# Altium PCB SAMV71_Xplained_Ultra.PcbDoc (part 7 of 7)
Units mm, origin at the board's own origin, x right, y up, seen from the top; angles counter-clockwise.
Board outline 90 x 135 mm, 8 copper layers (Top Layer LF-Signals, Ground Plane 1 (GND), Power Plane (VCC), Ground Plane 2 (GND), Signal Layer 1, Signal Layer 2, Ground Plane 3 (GND), Bottom Layer LF-Signals), stack 1.588 mm thick; 391 components, 330 nets, 1782 pads, 966 vias.
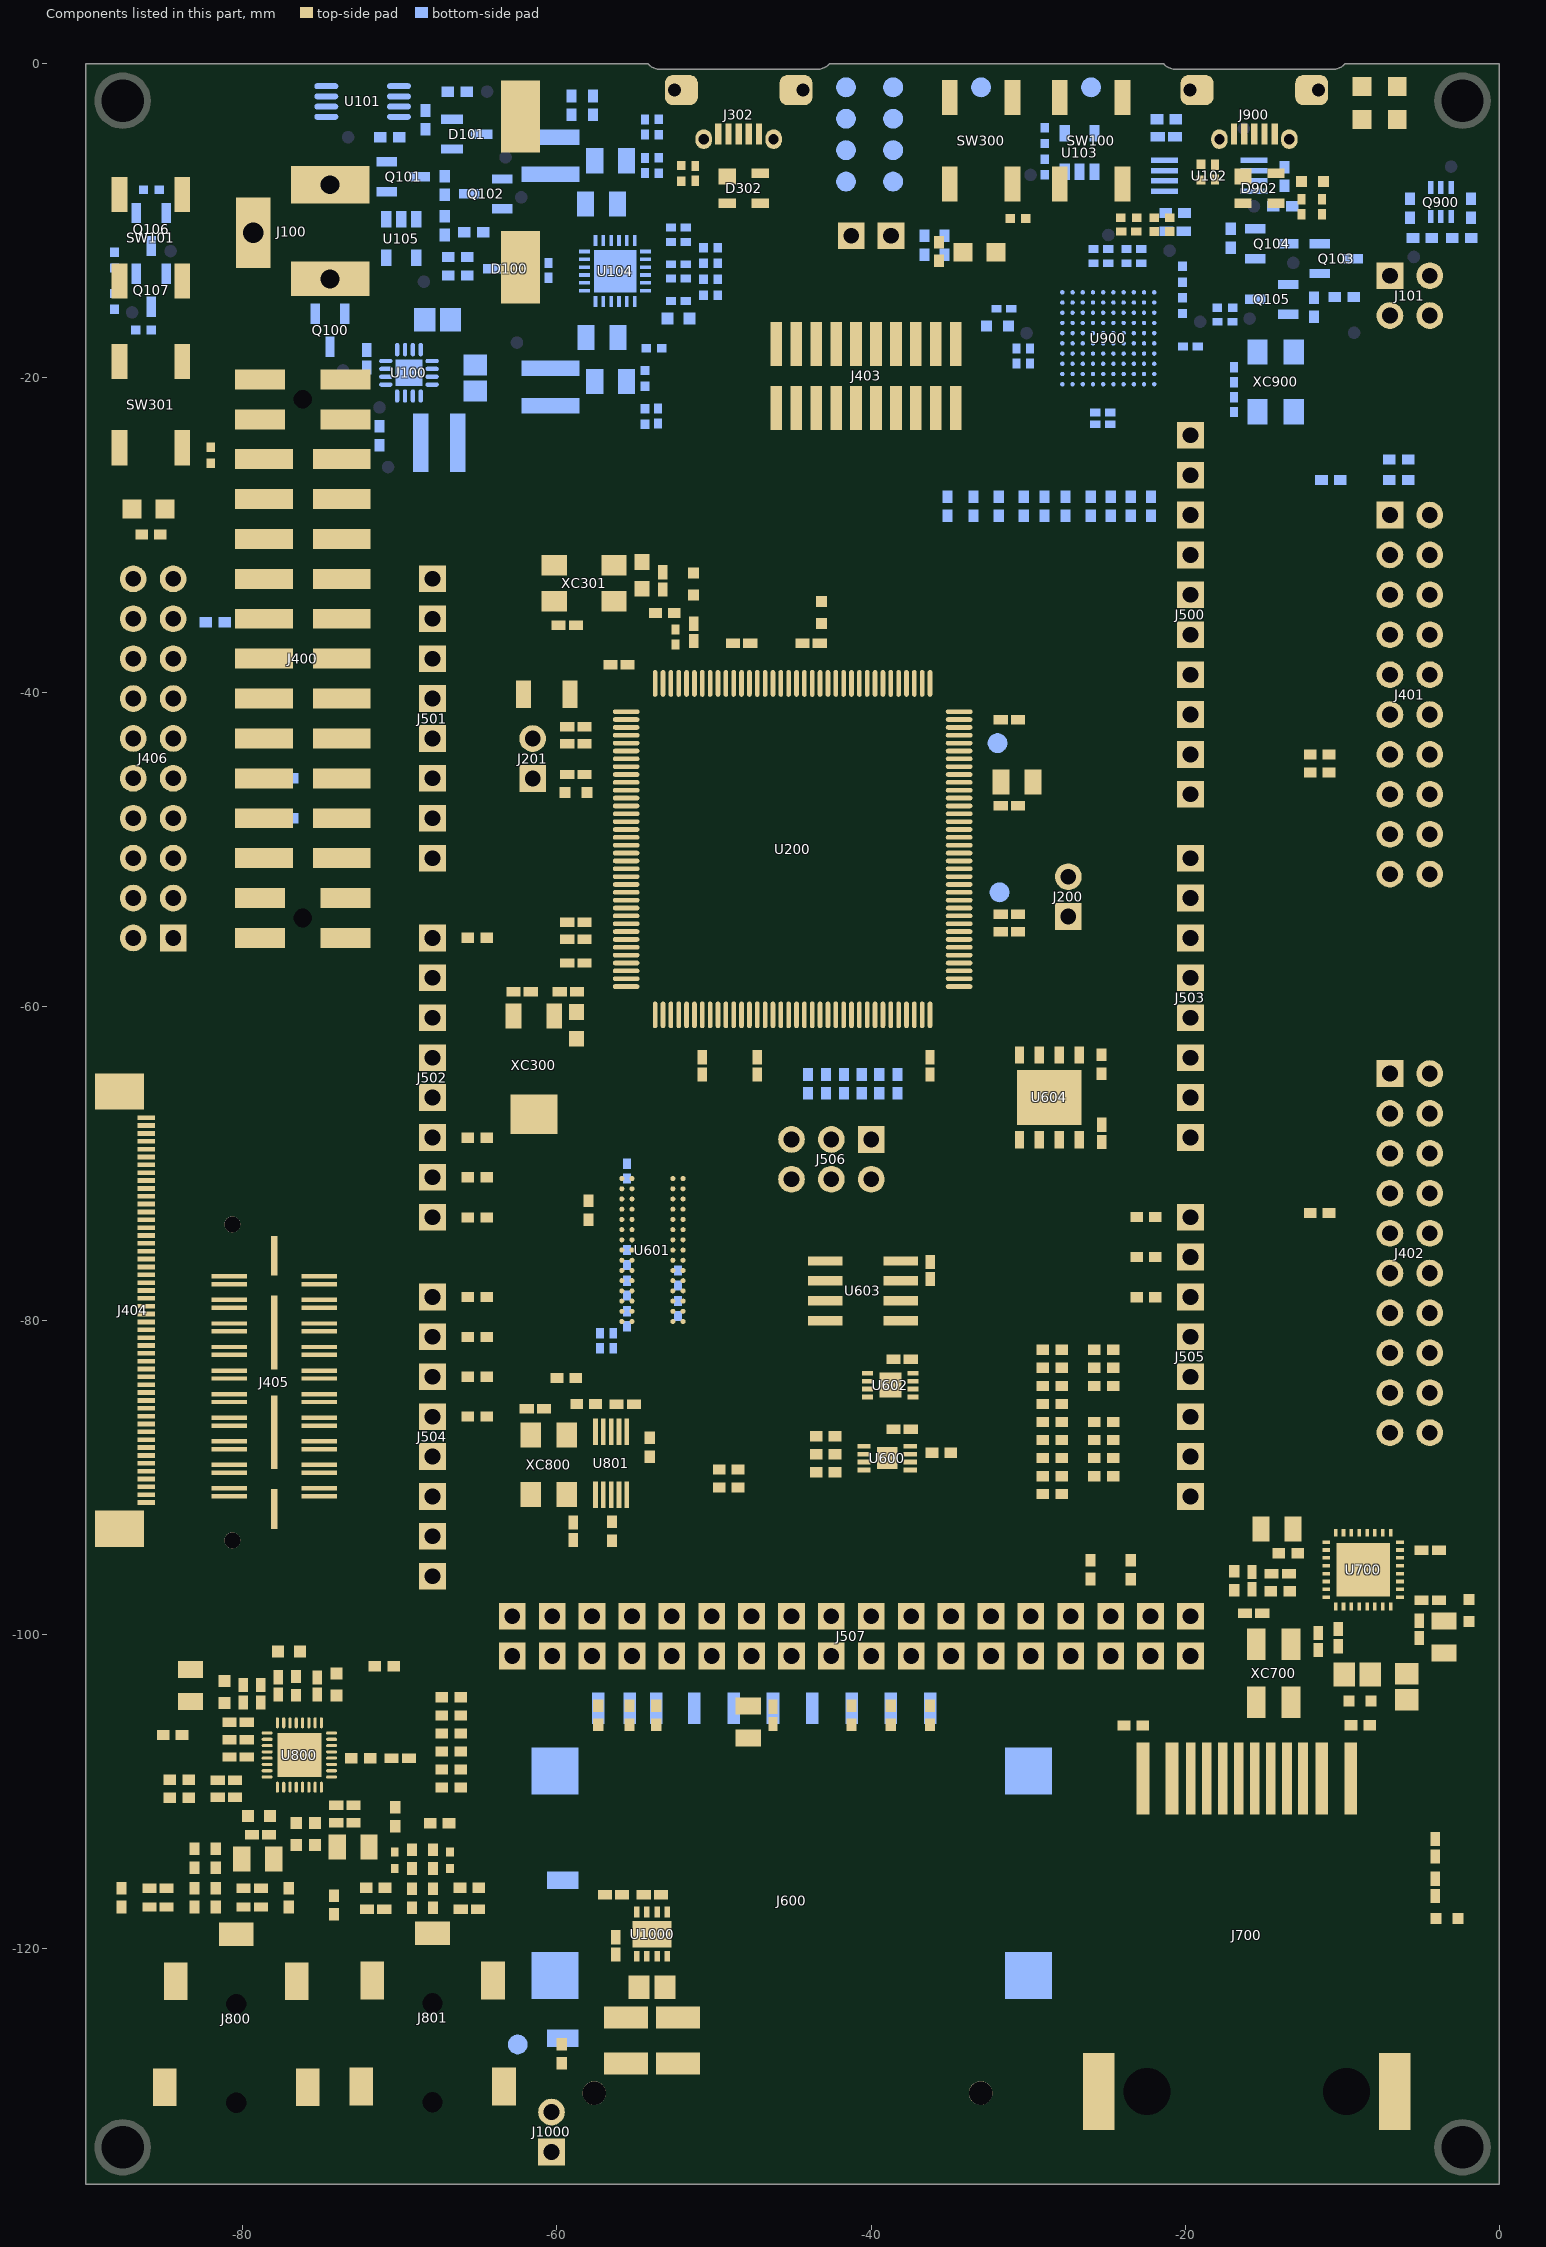
[diagram p13: the components of this part, seen from the top]

## Silkscreen, mask and mechanical layers (free items; w line width, h text height)
Top Overlay:
  circle w0.254: c-83.571,-2.35 r0.15
  pour cut-out: -4.25,-2.35 ccw(c-2.35,-2.35) -2.35,-4.25 ccw(c-2.35,-2.35) -0.45,-2.35 ccw(c-2.35,-2.35) -2.35,-0.45 ccw(c-2.35,-2.35)
  lines w0.254: -83.971,-4.5 -83.171,-4.5 ; -83.571,-4.5 -83.571,-3.9 ; -83.571,-2.35 -82.071,-2.35 ; -82.51,-3.411 cw(c-83.571,-2.35) -82.51,-1.289 ; -81.571,-2.35 -80.771,-2.35 ; -81.171,-2.75 -81.171,-1.95
  text "GND" at -89.05,-5.75 h1.52
  text "GND" at -85.014,-5.75 h1.52
  text "GND" at -3.75,-5.75 h1.52
  text "VCC_TARGET" at -38.3,-6.775 h1 r90
  text "VCC_MCU" at -40.925,-6.8 h1 r90
  text "DEBUG USB" at -21.4,-8.1 h1.5 r90
  text "TARGET USB" at -54.35,-9.2 h1.5 r90
  text "POWER" at -8.25,-10 h1.5 r90
  text "STATUS" at -6,-10.25 h1.5 r90
  text "SW0" at -36.2,-10.4 h1.5
  text "RESET" at -29.2,-10.4 h1.5
  text "EXT" at -7.866,-11.951 h0.67
  text "GND" at -5.326,-11.951 h0.67
  text "MCU CURRENT MEASURE" at -42.925,-12.15 h1 r90
  text "1" at -9.063,-13.913 h1.5
  text "LED0" at -34.525,-14.1 h1.5
  text "CORESIGHT20" at -44.601,-14.767 h1.5
  text "PWR SWICH" at -81.3,-14.975 h1.5 r90
  text "POWER" at -14.223,-15.224 h1.5
  text "VIN" at -76.019,-16.375 h1.5
  text "3" at -9.063,-16.453 h1.5
  text "SUPER CAP" at -66.15,-17.15 h1.5
  text "CAMERA INTERFACE" at -80.925,-18.136 h1.5
  text "3V3" at -5.326,-18.264 h0.67
  text "5V0" at -7.866,-18.292 h0.67
  text "27" at -70.932,-23.093 h1.5
  text "SW1" at -81.425,-23.425 h1.5 r90
  text "SCL" at -17.8,-24.114 h1.5
  text "b" at -67.958,-24.556 h12
  text "SWD + ETM" at -43.475,-25.938 h1.5
  text "EXT1" at -7.7,-26.1 h1.5
  text "SDA" at -17.8,-26.653 h1.5
  text "AREF" at -17.801,-29.193 h1.5
  text "1" at -8.73,-29.238 h1.5
  text "12 MHz" at -61.226,-29.372 h1.5
  text "LED1" at -82.5,-29.875 h1.5 r90
  text "CRYSTAL" at -61.228,-30.614 h1.5
  text "21" at -70.932,-30.712 h1.5
  text "SAMV71" at -49.783,-30.836 h2
  text "X" at -41.43,-30.857 h4
  text "PLAINED" at -38.005,-30.857 h2
  text "ULTRA" at -29.082,-30.845 h1
  text "GND" at -17.801,-31.732 h1.5
  text "3" at -8.923,-31.778 h1.5
  text "VBAT" at -66.075,-33.258 h1.5
  text "D13" at -17.801,-34.271 h1.5
  text "5" at -8.925,-34.318 h1.5
  text "IOREF" at -66.075,-35.798 h1.5
  text "D12" at -17.801,-36.811 h1.5
  text "7" at -8.916,-36.858 h1.5
  text "SAMV71Q21" at -40,-36.95 h1.5
  text "RESET" at -66.075,-38.338 h1.5
  text "D11" at -17.801,-39.35 h1.5
  text "9" at -8.936,-39.349 h1.5
  text "3V3" at -66.075,-40.878 h1.5
  text "D10" at -17.801,-41.89 h1.5
  text "11" at -9.5,-41.889 h1.5
  text "11" at -70.932,-43.412 h1.5
  text "5V0" at -66.074,-43.418 h1.5
  text "D9" at -17.801,-44.43 h1.5
  text "13" at -9.673,-44.429 h1.5
  text "GND" at -66.075,-45.964 h1.5
  text "D8" at -17.801,-46.97 h1.5
  text "15" at -9.683,-46.969 h1.5
  text "J201" at -61.875,-48.325 h1.5
  text "GND" at -66.075,-48.498 h1.5
  text "17" at -9.7,-49.509 h1.5
  text "ERASE" at -29.725,-49.8 h1.5
  text "D7" at -17.801,-51.03 h1.5
  text "VIN" at -66.075,-51.038 h1.5
  text "SAMV71 DEBUG (SWD)" at -81.614,-51.489 h1.5 r90
  text "19" at -9.665,-52.049 h1.5
  text "PB12" at -25.476,-52.155 h1.5
  text "D6" at -17.801,-53.589 h1.5
  text "3V3" at -25.501,-54.83 h1.5
  text "1" at -70.932,-56.113 h1.5
  text "D5" at -17.801,-56.148 h1.5
  text "AD1" at -72.225,-58.658 h1.5
  text "D4" at -17.801,-58.708 h1.5
  text "AD2" at -72.406,-61.198 h1.5
  text "D3" at -17.801,-61.267 h1.5
  text "EXT2" at -6.978,-61.75 h1.5
  text "EXT4" at -89.081,-62.025 h1.5
  text "LCD" at -88.8,-63.4 h1.5
  text "AD3" at -72.397,-63.738 h1.5
  text "D2" at -17.801,-63.843 h1.5
  text "32.768 kHz" at -59.154,-64.609 h1.5
  text "1" at -8.73,-64.749 h1.5
  text "CRYSTAL" at -59.154,-65.85 h1.5
  text "D1 (TXD)" at -17.801,-66.13 h1.5
  text "AD4" at -72.432,-66.278 h1.5
  text "RST" at -47.23,-66.85 h1.5
  text "SCK" at -43.911,-66.85 h1.5
  text "MISO" at -40.425,-66.85 h1.5
  text "3" at -8.923,-67.288 h1.5
  text "D0 (RXD)" at -17.801,-68.69 h1.5
  text "AD5" at -72.407,-68.818 h1.5
  text "SDRAM" at -56.238,-69.75 h1.5
  text "5" at -8.925,-69.822 h1.5
  text "SPI" at -38.1,-70.225 h1.5
  text "QSPI FLASH" at -31.3,-70.675 h1.5
  text "AD6" at -72.409,-71.358 h1.5
  text "S25FL" at -31.3,-71.85 h1.5
  text "MEDIA LB" at -81.1,-72.125 h1.5
  text "7" at -8.916,-72.361 h1.5
  text "GND" at -47.575,-73.55 h1.5
  text "MOSI" at -44.174,-73.55 h1.5
  text "5V0" at -40.424,-73.55 h1.5
  text "AD7" at -72.425,-73.898 h1.5
  text "D14" at -17.801,-73.896 h1.5
  text "9" at -8.936,-74.909 h1.5
  text "D15" at -17.801,-76.435 h1.5
  text "11" at -9.5,-77.449 h1.5
  text "AD8" at -72.4,-78.978 h1.5
  text "D16" at -17.801,-78.975 h1.5
  text "13" at -9.673,-79.989 h1.5
  text "AD9" at -72.39,-81.518 h1.5
  text "D17" at -17.801,-81.514 h1.5
  text "15" at -9.683,-82.529 h1.5
  text "AD10" at -73.165,-84.058 h1.5
  text "D18" at -17.801,-84.054 h1.5
  text "17" at -9.7,-85.069 h1.5
  text "AD11" at -72.995,-86.598 h1.5
  text "D19" at -17.801,-86.594 h1.5
  text "CRYPTO FOOTPRINT" at -34.05,-86.946 h1.5 r90
  text "19" at -9.665,-87.609 h1.5
  text "DAC0" at -73.287,-89.138 h1.5
  text "D20" at -17.801,-89.134 h1.5
  text "DAC1" at -73.117,-91.678 h1.5
  text "D21" at -17.801,-91.673 h1.5
  text "AT24MAC402" at -43.7,-91.95 h1.5
  text "KSZ8061RNBVA" at -11.69,-92.459 h1.5
  text "ETHERNET CONFIG" at -30.377,-92.683 h1.5 r90
  text "CS2100" at -54.95,-93.475 h1.5
  text "CAN" at -72.6,-93.65 h1.5
  text "RX" at -72.041,-94.775 h1.5
  text "CAN" at -72.6,-96.225 h1.5
  text "D52" at -59.85,-97.025 h1.5 r90
  text "D46" at -52.228,-97.025 h1.5 r90
  text "D44" at -49.688,-97.025 h1.5 r90
  text "D40" at -44.775,-97.025 h1.5 r90
  text "D26" at -26.823,-97.025 h1.5 r90
  text "D24" at -24.3,-97.025 h1.5 r90
  text "D22" at -21.751,-97.025 h1.5 r90
  text "5V0" at -19.206,-97.024 h1.5 r90
  text "TX" at -72.04,-97.35 h1.5
  text "D53" at -59.85,-105.5 h1.5 r90
  text "D47" at -51.6,-105.5 h1.5 r90
  text "D45" at -49.688,-105.5 h1.5 r90
  text "D39" at -42.1,-105.5 h1.5 r90
  text "D27" at -26.823,-105.5 h1.5 r90
  text "D23" at -20.95,-105.5 h1.5 r90
  text "WM8904" at -73.8,-105.7 h1.5
  text "ATA6561" at -57.35,-115.425 h1.52
  text "HEADPHONE" at -86.475,-128.475 h1.52 r90
  text "MICROPHONE" at -61.275,-128.65 h1.52 r90
  text "GND" at -89.1,-130.6 h1.52
  text "GND" at -3.8,-130.6 h1.52
  text "CAN_L" at -58.375,-131.546 h1.5
  text "CAN_H" at -58.375,-133.336 h1.5
Bottom Overlay:
  lines w0.1: -62.575,-10.062 -62.575,-9.1 ; -62.575,-7.827 -62.575,-6.512 ; -16.35,-22.85 -16.35,-22.95 -16.05,-23.25 -15.95,-23.25
  lines w0.15: -88.917,-50.574 -88.447,-50.574 ; -88.917,-48.034 -88.447,-48.034 ; -88.917,-45.494 -88.447,-45.494 ; -88.917,-42.954 -88.447,-42.954 ; -88.917,-40.414 -88.447,-40.414 ; -88.917,-37.874 -88.447,-37.874 ; -88.917,-35.334 -88.447,-35.334 ; -88.917,-32.794 -88.447,-32.794 ; -88.447,-53.114 -88.917,-53.114 -88.917,-31.188 -88.267,-31.188
  text "BOOT" at -34.05,-1.964 h1.5
  text "GND" at -43.225,-2.425 h1 r270
  text "TCK" at -42.6,-3.964 h1.5
  text "RST" at -34.827,-3.964 h1.5
  text "TDI" at -42.6,-5.964 h1.5
  text "TDO" at -34.6,-5.964 h1.5
  text "TMS" at -42.6,-7.964 h1.5
  text "VCC" at -34.621,-7.964 h1.5
  text "EXT" at -6.4,-12.2 h0.67
  text "GND" at -0.9,-13.8 h0.67
  text "5V0" at -8.2,-16.35 h0.67
  text "3V3" at -0.9,-16.35 h0.67
  text "PA04" at -15.325,-24.225 h0.67
  text "PA03" at -15.319,-26.526 h0.67
  text "ADVREF" at -13.975,-29.066 h0.67
  text "ID" at -8.242,-29.066 h0.67
  text "GND" at -0.775,-29.066 h0.67
  text "GND" at -86.083,-31.5 h0.67
  text "GND" at -15.99,-31.606 h0.67
  text "PC31" at -8.242,-31.606 h0.67
  text "PA19" at -0.775,-31.606 h0.67
  text "VBAT" at -69.803,-33.13 h0.67
  text "NC" at -16.662,-34.146 h0.67
  text "PB03" at -8.242,-34.146 h0.67
  text "PB02" at -0.775,-34.146 h0.67
  text "3V3" at -69.803,-35.67 h0.67
  text "PD20" at -15.319,-36.686 h0.67
  text "PA00" at -8.242,-36.686 h0.67
  text "PC30" at -0.775,-36.686 h0.67
  text "RESET" at -79.238,-38.228 h0.67
  text "RESET" at -69.803,-38.21 h0.67
  text "PD21" at -15.542,-39.226 h0.67
  text "PD28" at -8.242,-39.226 h0.67
  text "PA05" at -0.775,-39.226 h0.67
  text "SWO" at -80.582,-40.706 h0.67
  text "3V3" at -69.803,-40.75 h0.67
  text "PD25" at -15.319,-41.766 h0.67
  text "PA03" at -8.242,-41.766 h0.67
  text "PA04" at -0.775,-41.766 h0.67
  text "5V0" at -69.803,-43.29 h0.67
  text "PC09" at -15.319,-44.306 h0.67
  text "PB00" at -8.242,-44.306 h0.67
  text "PB01" at -0.775,-44.306 h0.67
  text "SWCLK" at -79.238,-45.83 h0.67
  text "GND" at -69.803,-45.83 h0.67
  text "PA05" at -15.319,-46.846 h0.67
  text "PD25" at -8.242,-46.846 h0.67
  text "PD21" at -0.775,-46.846 h0.67
  text "SWDIO" at -79.35,-48.37 h0.67
  text "GND" at -69.803,-48.37 h0.67
  text "PD20" at -8.242,-49.386 h0.67
  text "PD22" at -0.775,-49.386 h0.67
  text "GND" at -80.785,-50.91 h0.67
  text "VIN" at -69.803,-50.91 h0.67
  text "PA02" at -15.319,-50.91 h0.67
  text "GND" at -8.242,-51.926 h0.67
  text "VCC" at -0.775,-51.926 h0.67
  text "PC19" at -15.431,-53.45 h0.67
  text "3V3" at -80.785,-55.99 h0.67
  text "PD26" at -69.803,-55.99 h0.67
  text "PD11" at -15.654,-55.99 h0.67
  text "3V3" at -86.075,-58.125 h0.67
  text "PC31" at -69.803,-58.53 h0.67
  text "PD27" at -15.319,-58.53 h0.67
  text "PA19" at -69.803,-61.07 h0.67
  text "PA06" at -15.319,-61.07 h0.67
  text "PD30" at -69.803,-63.61 h0.67
  text "PA00" at -15.319,-63.61 h0.67
  text "ID" at -8.242,-64.626 h0.67
  text "GND" at -0.775,-64.626 h0.67
  text "PC13" at -69.803,-66.15 h0.67
  text "PD30" at -15.319,-66.15 h0.67
  text "XPLAINED PRO" at -25.875,-66.909 h0.67
  text "PD30" at -8.242,-67.166 h0.67
  text "PC13" at -0.775,-67.166 h0.67
  text "EXTENSION HEADER" at -24.531,-68.059 h0.67
  text "PE00" at -69.803,-68.69 h0.67
  text "PD28" at -15.431,-68.69 h0.67
  text "PA06" at -8.242,-69.706 h0.67
  text "PD11" at -0.775,-69.706 h0.67
  text "ID" at -29.8,-71.025 h1.3
  text "GND" at -22.675,-71.025 h1.3
  text "PE03" at -69.803,-71.23 h0.67
  text "PC19" at -8.242,-72.246 h0.67
  text "PD26" at -0.775,-72.246 h0.67
  text "ADC+" at -29.8,-73.15 h1.3
  text "ADC-" at -22.675,-73.15 h1.3
  text "PE04" at -69.803,-73.77 h0.67
  text "PB01" at -15.542,-73.77 h0.67
  text "PA02" at -8.242,-74.786 h0.67
  text "PA24" at -0.775,-74.786 h0.67
  text "GPIO0" at -29.8,-75.275 h1.3
  text "GPIO1" at -22.675,-75.275 h1.3
  text "PB00" at -15.319,-76.31 h0.67
  text "PA03" at -8.242,-77.326 h0.67
  text "PA04" at -0.775,-77.326 h0.67
  text "PWM+" at -29.8,-77.4 h1.3
  text "PWM-" at -22.675,-77.4 h1.3
  text "PD24" at -69.803,-78.85 h0.67
  text "PD16" at -15.431,-78.85 h0.67
  text "IRQ" at -29.8,-79.525 h1.3
  text "SPI_SS_B" at -22.675,-79.525 h1.3
  text "PA21" at -8.242,-79.866 h0.67
  text "PB04" at -0.775,-79.866 h0.67
  text "PA10" at -69.803,-81.39 h0.67
  text "PD15" at -15.431,-81.39 h0.67
  text "TWI_SDA" at -29.8,-81.65 h1.3
  text "TWI_SCL" at -22.675,-81.65 h1.3
  text "PD27" at -8.242,-82.406 h0.67
  text "PD21" at -0.775,-82.406 h0.67
  text "UART_RX" at -29.8,-83.775 h1.3
  text "UART_TX" at -22.675,-83.775 h1.3
  text "PA22" at -69.803,-83.93 h0.67
  text "PD19" at -15.431,-83.93 h0.67
  text "PD20" at -8.242,-84.946 h0.67
  text "PD22" at -0.775,-84.946 h0.67
  text "SPI_SS_A" at -29.8,-85.9 h1.3
  text "SPI_MOSI" at -22.675,-85.9 h1.3
  text "PE05" at -69.803,-86.47 h0.67
  text "PD18" at -15.431,-86.47 h0.67
  text "GND" at -8.242,-87.486 h0.67
  text "3V3" at -0.775,-87.486 h0.67
  text "SPI_MISO" at -29.8,-88.025 h1.3
  text "SPI_SCK" at -22.675,-88.025 h1.3
  text "PB13" at -69.803,-89.01 h0.67
  text "PD27" at -15.319,-89.01 h0.67
  text "GND" at -29.8,-90.15 h1.3
  text "VCC" at -22.675,-90.15 h1.3
  text "PD00" at -69.803,-91.55 h0.67
  text "PD28" at -15.319,-91.55 h0.67
  text "PB03" at -69.803,-94.09 h0.67
  text "PB02" at -69.803,-96.63 h0.67
  text "GND" at -63.236,-96.829 h0.67 r270
  text "PC12" at -60.645,-96.829 h0.67 r270
  text "PA21" at -53.076,-96.829 h0.67 r270
  text "PA25" at -50.536,-96.829 h0.67 r270
  text "PB03" at -45.456,-96.829 h0.67 r270
  text "PD19" at -27.676,-96.829 h0.67 r270
  text "PB00" at -25.136,-96.829 h0.67 r270
  text "PA18" at -22.611,-96.829 h0.67 r270
  text "5V0" at -20.006,-96.829 h0.67 r270
  text "GND" at -63.186,-104.357 h0.67 r270
  text "5V0" at -20,-104.357 h0.67 r270
  text "PB01" at -22.546,-104.805 h0.67 r270
  text "PC14" at -60.6,-104.917 h0.67 r270
  text "PD18" at -27.625,-104.917 h0.67 r270
  text "PB04" at -52.775,-105.029 h0.67 r270
  text "PA24" at -50.345,-105.029 h0.67 r270
  text "PB02" at -42.85,-105.029 h0.67 r270
  text "c" at -13.523,-112.326 h4 r270
  text "p" at -13.507,-117.854 h4 r270
  text "A08-2216 Rev 2" at -5.387,-122.875 h2 r270
  text "Atmel Corp © 2015" at -8.776,-124.198 h2 r270
  text "t" at -13.503,-124.571 h4 r270
Mechanical 1:
  lines w0.1: -19.1,-0.353 -12.082,-0.353 ; -90,-135 -90,0 -54.209,0 ccw(c-53.434,0.686) -53.434,-0.35 -43.434,-0.35 ccw(c-43.434,0.686) -42.659,-0.001 -21.375,0 ccw(c-20.6,0.686) -20.6,-0.35 -10.6,-0.35 ccw(c-10.6,0.686) -9.825,-0.001 0,0 0,-135 -90,-135
Mechanical 4:
  circle w0.2: c-87.65,-132.65 r1.35
  circle w0.254: c-6.97,-64.29 r0.5
  circle w0.254: c-4.43,-64.29 r0.5
  circle w0.254: c-6.97,-66.83 r0.5
  circle w0.254: c-4.43,-66.83 r0.5
  circle w0.254: c-6.97,-69.37 r0.5
  circle w0.254: c-4.43,-69.37 r0.5
  circle w0.254: c-6.97,-71.91 r0.5
  circle w0.254: c-4.43,-71.91 r0.5
  circle w0.254: c-4.43,-74.45 r0.5
  circle w0.254: c-6.97,-74.45 r0.5
  circle w0.254: c-6.97,-76.99 r0.5
  circle w0.254: c-4.43,-76.99 r0.5
  circle w0.254: c-6.97,-79.53 r0.5
  circle w0.254: c-4.43,-79.53 r0.5
  circle w0.254: c-4.43,-82.07 r0.5
  circle w0.254: c-6.97,-82.07 r0.5
  circle w0.254: c-6.97,-84.61 r0.5
  circle w0.254: c-4.43,-84.61 r0.5
  circle w0.254: c-6.995,-28.73 r0.5
  circle w0.254: c-4.455,-28.73 r0.5
  circle w0.254: c-6.995,-31.27 r0.5
  circle w0.254: c-4.455,-31.27 r0.5
  circle w0.254: c-6.995,-33.81 r0.5
  circle w0.254: c-4.455,-33.81 r0.5
  circle w0.254: c-6.995,-36.35 r0.5
  circle w0.254: c-4.455,-36.35 r0.5
  circle w0.254: c-4.455,-38.89 r0.5
  circle w0.254: c-6.995,-38.89 r0.5
  circle w0.254: c-6.995,-41.43 r0.5
  circle w0.254: c-4.455,-41.43 r0.5
  circle w0.254: c-6.995,-43.97 r0.5
  circle w0.254: c-4.455,-43.97 r0.5
  circle w0.254: c-4.455,-46.51 r0.5
  circle w0.254: c-6.995,-46.51 r0.5
  circle w0.254: c-6.995,-49.05 r0.5
  circle w0.254: c-4.455,-49.05 r0.5
  circle w0.254: c-4.455,-51.59 r0.5
  circle w0.254: c-6.995,-51.59 r0.5
  circle w0.254: c-4.455,-13.49 r0.5
  circle w0.254: c-6.995,-13.49 r0.5
  circle w0.254: c-6.995,-16.03 r0.5
  circle w0.254: c-4.455,-16.03 r0.5
  circle w0.2: c-2.35,-2.35 r1.35
  circle w0.2: c-87.65,-2.35 r1.35
  circle w0.2: c-2.35,-132.65 r1.35
  rectangle: -86.7,-67.225 -85.6,-66.975
  rectangle: -86.7,-67.725 -85.6,-67.475
  rectangle: -86.7,-68.225 -85.6,-67.975
  rectangle: -86.7,-68.725 -85.6,-68.475
  rectangle: -86.7,-69.225 -85.6,-68.975
  rectangle: -86.7,-69.725 -85.6,-69.475
  rectangle: -86.7,-70.225 -85.6,-69.975
  rectangle: -86.7,-70.725 -85.6,-70.475
  rectangle: -86.7,-71.225 -85.6,-70.975
  rectangle: -86.7,-71.725 -85.6,-71.475
  rectangle: -86.7,-72.225 -85.6,-71.975
  rectangle: -86.7,-72.725 -85.6,-72.475
  rectangle: -86.7,-73.225 -85.6,-72.975
  rectangle: -86.7,-73.725 -85.6,-73.475
  rectangle: -86.7,-74.225 -85.6,-73.975
  rectangle: -86.7,-74.725 -85.6,-74.475
  rectangle: -86.7,-75.225 -85.6,-74.975
  rectangle: -86.7,-75.725 -85.6,-75.475
  rectangle: -86.7,-76.225 -85.6,-75.975
  rectangle: -86.7,-76.725 -85.6,-76.475
  rectangle: -86.7,-77.225 -85.6,-76.975
  rectangle: -86.7,-77.725 -85.6,-77.475
  rectangle: -86.7,-78.225 -85.6,-77.975
  rectangle: -86.7,-78.725 -85.6,-78.475
  rectangle: -86.7,-79.225 -85.6,-78.975
  rectangle: -86.7,-91.725 -85.6,-91.475
  rectangle: -86.7,-91.225 -85.6,-90.975
  rectangle: -86.7,-90.725 -85.6,-90.475
  rectangle: -86.7,-90.225 -85.6,-89.975
  rectangle: -86.7,-89.725 -85.6,-89.475
  rectangle: -86.7,-89.225 -85.6,-88.975
  rectangle: -86.7,-88.725 -85.6,-88.475
  rectangle: -86.7,-88.225 -85.6,-87.975
  rectangle: -86.7,-87.725 -85.6,-87.475
  rectangle: -86.7,-87.225 -85.6,-86.975
  rectangle: -86.7,-86.725 -85.6,-86.475
  rectangle: -86.7,-86.225 -85.6,-85.975
  rectangle: -86.7,-85.725 -85.6,-85.475
  rectangle: -86.7,-85.225 -85.6,-84.975
  rectangle: -86.7,-84.725 -85.6,-84.475
  rectangle: -86.7,-84.225 -85.6,-83.975
  rectangle: -86.7,-83.725 -85.6,-83.475
  rectangle: -86.7,-83.225 -85.6,-82.975
  rectangle: -86.7,-82.725 -85.6,-82.475
  rectangle: -86.7,-82.225 -85.6,-81.975
  rectangle: -86.7,-81.725 -85.6,-81.475
  rectangle: -86.7,-81.225 -85.6,-80.975
  rectangle: -86.7,-80.725 -85.6,-80.475
  rectangle: -86.7,-80.225 -85.6,-79.975
  rectangle: -86.7,-79.725 -85.6,-79.475
  region: -86.3,-66.58 -86.3,-64.28 -89.4,-64.28 -89.4,-66.58
  region: -86.3,-94.42 -86.3,-92.12 -89.4,-92.12 -89.4,-94.42
  rectangle: -49.95,-5.85 -49.525,-4.45
  rectangle: -49.3,-5.85 -48.875,-4.45
  rectangle: -48.65,-5.85 -48.225,-4.45
  rectangle: -48,-5.85 -47.575,-4.45
  rectangle: -47.35,-5.85 -46.925,-4.45
  rectangle: -53.325,-3.25 -51.025,-1.35
  rectangle: -50.475,-3.25 -48.7,-1.35
  region: -46.393,-1.35 -48.168,-1.35 -48.168,-3.25 -46.393,-3.25
  region: -43.543,-1.35 -45.843,-1.35 -45.843,-3.25 -43.543,-3.25
  region: -10.709,-1.35 -13.009,-1.35 -13.009,-3.25 -10.709,-3.25
  region: -13.559,-1.35 -15.334,-1.35 -15.334,-3.25 -13.559,-3.25
  rectangle: -17.641,-3.25 -15.866,-1.35
  rectangle: -20.491,-3.25 -18.191,-1.35
  rectangle: -14.516,-5.85 -14.091,-4.45
  rectangle: -15.166,-5.85 -14.741,-4.45
  rectangle: -15.816,-5.85 -15.391,-4.45
  rectangle: -16.466,-5.85 -16.041,-4.45
  rectangle: -17.116,-5.85 -16.691,-4.45
  lines w0.1: -88.65,-79.35 -87.65,-79.35 ; -88.15,-79.85 -88.15,-78.85 ; -6.233,-40.16 -5.233,-40.16 ; -6.233,-14.76 -5.233,-14.76 ; -6.208,-75.72 -5.208,-75.72 ; -5.725,-40.66 -5.725,-39.66 ; -5.725,-15.26 -5.725,-14.26 ; -5.7,-76.22 -5.7,-75.22
  text "Xplained Ultra MCU Connector Placement" at -86.86,13.425 h5
  text "TARGET USB" at -53.25,-7.575 h1
  text "DEBUG USB" at -19.95,-7.575 h1
  text "1" at -7.162,-12.05 h1
  text "2" at -4.788,-12.05 h1
  text "Power Header" at -20.3,-15.26 h1
  text "1" at -7.162,-27.29 h1
  text "2" at -4.788,-27.29 h1
  text "Extension Header 1" at -25.798,-40.66 h1
  text "1" at -7.137,-62.85 h1
  text "2" at -4.763,-62.85 h1
  text "1" at -84.8,-67.559 h1.5
  text "10" at -84.8,-72.059 h1.5
  text "Extension Header 2" at -26.131,-76.22 h1
  text "20" at -84.8,-77.059 h1.5
  text "LCD Connector" at -82.6,-79.85 h1
  text "30" at -84.801,-82.059 h1.5
  text "40" at -84.8,-87.059 h1.5
  text "50" at -84.8,-92.059 h1.5
Mechanical 5:
  circle w0.254: c-19.67,-33.805 r0.5
  circle w0.254: c-19.67,-31.265 r0.5
  circle w0.254: c-19.67,-28.725 r0.5
  circle w0.254: c-19.67,-26.185 r0.5
  circle w0.254: c-19.67,-23.645 r0.5
  circle w0.254: c-19.67,-36.345 r0.5
  circle w0.254: c-19.67,-38.885 r0.5
  circle w0.254: c-19.67,-41.425 r0.5
  circle w0.254: c-19.67,-43.965 r0.5
  circle w0.254: c-19.67,-46.505 r0.5
  circle w0.254: c-19.67,-68.349 r0.5
  circle w0.254: c-19.67,-65.809 r0.5
  circle w0.254: c-19.67,-63.269 r0.5
  circle w0.254: c-19.67,-50.569 r0.5
  circle w0.254: c-19.67,-53.109 r0.5
  circle w0.254: c-19.67,-55.649 r0.5
  circle w0.254: c-19.67,-58.189 r0.5
  circle w0.254: c-19.67,-60.729 r0.5
  circle w0.254: c-19.67,-91.209 r0.5
  circle w0.254: c-19.67,-88.669 r0.5
  circle w0.254: c-19.67,-86.129 r0.5
  circle w0.254: c-19.67,-73.429 r0.5
  circle w0.254: c-19.67,-75.969 r0.5
  circle w0.254: c-19.67,-78.509 r0.5
  circle w0.254: c-19.67,-81.049 r0.5
  circle w0.254: c-19.67,-83.589 r0.5
  circle w0.254: c-67.93,-55.649 r0.5
  circle w0.254: c-67.93,-50.569 r0.5
  circle w0.254: c-67.93,-48.029 r0.5
  circle w0.254: c-67.93,-45.489 r0.5
  circle w0.254: c-67.93,-32.789 r0.5
  circle w0.254: c-67.93,-35.329 r0.5
  circle w0.254: c-67.93,-37.869 r0.5
  circle w0.254: c-67.93,-40.409 r0.5
  circle w0.254: c-67.93,-42.949 r0.5
  circle w0.254: c-67.93,-81.049 r0.5
  circle w0.254: c-67.93,-78.509 r0.5
  circle w0.254: c-67.93,-73.429 r0.5
  circle w0.254: c-67.93,-70.889 r0.5
  circle w0.254: c-67.93,-58.189 r0.5
  circle w0.254: c-67.93,-60.729 r0.5
  circle w0.254: c-67.93,-63.269 r0.5
  circle w0.254: c-67.93,-65.809 r0.5
  circle w0.254: c-67.93,-68.349 r0.5
  circle w0.254: c-67.93,-96.289 r0.5
  circle w0.254: c-67.93,-83.589 r0.5
  circle w0.254: c-67.93,-86.129 r0.5
  circle w0.254: c-67.93,-88.669 r0.5
  circle w0.254: c-67.93,-91.209 r0.5
  circle w0.254: c-67.93,-93.749 r0.5
  circle w0.254: c-39.995,-98.834 r0.5
  circle w0.254: c-42.535,-98.834 r0.5
  circle w0.254: c-45.075,-98.834 r0.5
  circle w0.254: c-47.615,-98.834 r0.5
  circle w0.254: c-50.155,-98.834 r0.5
  circle w0.254: c-62.855,-98.834 r0.5
  circle w0.254: c-60.315,-98.834 r0.5
  circle w0.254: c-57.775,-98.834 r0.5
  circle w0.254: c-55.235,-98.834 r0.5
  circle w0.254: c-52.695,-98.834 r0.5
  circle w0.254: c-39.995,-101.374 r0.5
  circle w0.254: c-42.535,-101.374 r0.5
  circle w0.254: c-45.075,-101.374 r0.5
  circle w0.254: c-47.615,-101.374 r0.5
  circle w0.254: c-50.155,-101.374 r0.5
  circle w0.254: c-62.855,-101.374 r0.5
  circle w0.254: c-60.315,-101.374 r0.5
  circle w0.254: c-57.775,-101.374 r0.5
  circle w0.254: c-55.235,-101.374 r0.5
  circle w0.254: c-52.695,-101.374 r0.5
  circle w0.254: c-19.675,-98.834 r0.5
  circle w0.254: c-22.215,-98.834 r0.5
  circle w0.254: c-24.755,-98.834 r0.5
  circle w0.254: c-37.455,-98.834 r0.5
  circle w0.254: c-34.915,-98.834 r0.5
  circle w0.254: c-32.375,-98.834 r0.5
  circle w0.254: c-29.835,-98.834 r0.5
  circle w0.254: c-27.295,-98.834 r0.5
  circle w0.254: c-19.675,-101.374 r0.5
  circle w0.254: c-22.215,-101.374 r0.5
  circle w0.254: c-24.755,-101.374 r0.5
  circle w0.254: c-37.455,-101.374 r0.5
  circle w0.254: c-34.915,-101.374 r0.5
  circle w0.254: c-32.375,-101.374 r0.5
  circle w0.254: c-29.835,-101.374 r0.5
  circle w0.254: c-27.295,-101.374 r0.5
  circle w0.254: c-45.075,-68.481 r0.5
  circle w0.254: c-42.535,-68.481 r0.5
  circle w0.254: c-39.995,-68.481 r0.5
  circle w0.254: c-45.07,-71.021 r0.5
  circle w0.254: c-42.53,-71.021 r0.5
  circle w0.254: c-39.99,-71.021 r0.5
  text "Xplained Ultra MCU Arduino Connector Placement" at -95.189,13.425 h5
  text "1" at -21.528,-24.145 h1
  text "1" at -65.725,-33.289 h1
  text "10" at -18.2,-47.005 h1
  text "Offset, not 100 mil" at -54.1,-49.3 h1.52
  text "1" at -21.528,-50.1 h1
  text "8" at -65.725,-51.069 h1
  text "1" at -65.725,-56.149 h1
  text "8" at -21.695,-68.849 h1
  text "8" at -65.725,-73.929 h1
  text "1" at -21.528,-73.929 h1
  text "1" at -65.725,-79.009 h1
  text "100-mil pitch" at -50.5,-80.9 h1.52
  text "8" at -21.695,-91.709 h1
  text "8" at -65.725,-96.789 h1
  text "35" at -63.688,-97.6 h1
  text "1" at -17.728,-99.334 h1
  text "36" at -66.1,-101.874 h1
  text "2" at -17.895,-101.874 h1
Mechanical 6:
  circle w0.254: c-87.65,-2.35 r1.35
  circle w0.254: c-2.35,-2.35 r1.35
  circle w0.254: c-2.35,-132.65 r1.35
  circle w0.254: c-87.65,-132.65 r1.35
  text "Xplained Ultra Mechanical Dimensions" at -83.192,13.452 h5
Mechanical 9:
  circle w0.5: c-64.401,44 r1.25
  circle w0.5: c-0.401,44 r1.25
  circle w0.5: c-31.651,44 r1.25
  circle w0.5: c-2.35,-132.65 r1.5
  circle w0.5: c-2.35,-2.35 r1.5
  circle w0.5: c-87.651,-132.65 r1.5
  circle w0.5: c-87.651,-2.35 r1.5
  lines w0.5: -85.151,-128.65 cw(c-85.151,-130.15) -83.651,-130.15 ; -85.001,-128.65 -87.501,-128.65 cw(c-87.501,-127.15) -89.001,-127.15 -89.001,-7.85 cw(c-87.501,-7.85) -87.501,-6.35 -85.151,-6.35 ccw(c-85.151,-4.85) -83.651,-4.85 -83.651,-2 cw(c-82.151,-2) -82.151,-0.5 -7.851,-0.5 cw(c-7.851,-2) -6.351,-2 -6.351,-4.85 ccw(c-4.851,-4.85) -4.851,-6.35 -2.501,-6.35 cw(c-2.501,-7.85) -1.001,-7.85 -1.001,-127.15 cw(c-2.501,-127.15) -2.501,-128.65 -4.851,-128.65 ccw(c-4.851,-130.15) -6.351,-130.15 -6.351,-132.5 cw(c-7.851,-132.5) -7.851,-134 -82.151,-134 cw(c-82.151,-132.5) -83.651,-132.5 -83.651,-130 ; -135.001,-147.5 -132.001,-150.5 41.999,-150.5 44.999,-147.5 44.999,46.5 41.999,49.5 -132.001,49.5 -135.001,46.5 -135.001,-147.5 ; -71.151,3.5 cw(c-71.151,5) -71.151,6.5 -71.151,35.5 cw(c-71.151,37) -71.151,38.5 6.349,38.5 cw(c6.349,37) 6.349,35.5 6.349,6.5 cw(c6.349,5) 6.349,3.5 -71.151,3.5
  text "Xplained Ultra FCT" at 28.949,-90.419 h10 r90
  text "Mechanical 9 layer contains the outline for the Xplained Ultra MCU test-jig." at -132.124,-153.82 h3
Mechanical 10:
  circle w0.5: c-2.35,-132.65 r1.5
  circle w0.5: c-87.65,-132.65 r1.5
  circle w0.5: c-87.65,-2.35 r1.5
  circle w0.5: c-87.65,-2.35 r2.5
  circle w0.5: c-87.65,-132.65 r2.5
  circle w0.5: c-2.35,-132.65 r2.5
  circle w0.5: c-2.35,-2.35 r2.5
  circle w0.5: c-2.35,-2.35 r1.5
  text "Mechanical 10 layer shows where pcb pushers will land on top of the PCB when placed in the jig." at -132.124,-157.095 h3
Mechanical 12:
  circle w0.2: c-2.35,-132.65 r1.35
  circle w0.2: c-57.65,-2.35 r1.35
  circle w0.2: c-2.35,-2.35 r1.35
  circle w0.5: c-41.6,-1.5 r0.25
  circle w0.5: c-41.6,-3.5 r0.25
  circle w0.5: c-41.6,-5.5 r0.25
  circle w0.5: c-41.6,-7.5 r0.25
  circle w0.5: c-38.6,-1.5 r0.25
  circle w0.5: c-38.6,-3.5 r0.25
  circle w0.5: c-38.6,-5.5 r0.25
  circle w0.5: c-38.6,-7.5 r0.25
  circle w0.5: c-33,-1.5 r0.25
  circle w0.5: c-26,-1.5 r0.25
  lines w0.3: -48.15,-22.225 -41.65,-22.225 -41.65,-8.425 ; -48.15,-20.075 -43.6,-20.075 -43.6,-5.525 ; -48.15,-17.8 -44.625,-17.8 -44.625,-3.475 -42.325,-3.475 ; -48.15,-15.725 -45.525,-15.725 -45.525,-1.5 -42.325,-1.5 ; -43.054,-6.2 -42.354,-5.5 -43.054,-4.8 ; -43.025,-4.175 -42.325,-3.475 ; -43.025,-2.775 -42.325,-3.475 ; -43.025,-2.2 -42.325,-1.5 ; -43.025,-0.8 -42.325,-1.5 ; -42.35,-9.125 -41.65,-8.425 ; -42.3,-9.225 -41.6,-8.525 -40.9,-9.225 ; -40.95,-9.125 -41.65,-8.425 ; -39.3,-9.225 -38.6,-8.525 -37.9,-9.225 ; -39.25,-9.125 -38.55,-8.425 ; -37.85,-9.125 -38.55,-8.425 ; -37.175,-6.125 -37.875,-5.425 ; -37.175,-4.725 -37.875,-5.425 ; -37.175,-4.175 -37.875,-3.475 ; -37.175,-2.775 -37.875,-3.475 ; -37.175,-2.2 -37.875,-1.5 ; -37.175,-0.8 -37.875,-1.5 ; -33.675,-3.25 -32.975,-2.55 ; -32.975,-7.125 -32.975,-2.55 ; -32.275,-3.25 -32.975,-2.55 ; -32.05,-22.225 -38.55,-22.225 -38.55,-8.425 ; -32.05,-20.075 -36.6,-20.075 -36.6,-5.425 -37.875,-5.425 ; -32.05,-17.8 -35.575,-17.8 -35.575,-3.475 -37.875,-3.475 ; -32.05,-15.725 -34.675,-15.725 -34.675,-1.5 -37.875,-1.5 ; -26.7,-3.2 -26,-2.5 ; -26,-4.5 -26,-2.5 ; -25.3,-3.2 -26,-2.5
  text "Xplained Ultra MCU Test Points Placement" at -87.727,13.425 h5
  text "TP_TARGET_RESET" at -26.425,-6.075 h1
  text "TP_TARGET_BOOT" at -33.45,-8.7 h1
  text "TP_GND" at -54.427,-16.175 h1
  text "TP_EDBG_BOOT" at -31.25,-16.175 h1
  text "TP_EDBG_TCK" at -59.425,-18.383 h1
  text "TP_EDBG_RESET" at -31.25,-18.383 h1
  text "TP_EDBG_TDI" at -59.092,-20.592 h1
  text "TP_EDBG_TDO" at -31.25,-20.592 h1
  text "TP_EDBG_TMS" at -59.425,-22.8 h1
  text "TP_VCC_EDBG_P3V3" at -31.25,-22.8 h1
  text "TEST POINTS ON BOTTOM LAYER" at -52.725,-27.9 h1
Mechanical 14:
  drawing of 530 lines, arcs and shapes, not listed
  text "TARGET USB" at -53.25,-6.95 h1
  text "DEBUG USB" at -19.95,-6.95 h1
  text "1" at -71.343,-8.2 h1
  text "MCU Power" at -35.625,-10.586 h1 r90
  text "2" at -77.765,-11.25 h1
  text "1" at -7.162,-12.05 h1
  text "2" at -4.788,-12.05 h1
  text "Power Jack" at -67.417,-12.722 h1 r90
  text "1" at -41.437,-13.888 h1
  text "2" at -39.063,-13.877 h1
  text "3" at -71.51,-14.2 h1
  text "Camera Interface" at -83.775,-17.85 h1
  text "19" at -48.856,-19.547 h1
  text "1" at -33.24,-19.54 h1
  text "Power Header" at -8.687,-20.508 h1 r90
  text "30" at -80.328,-20.594 h1
  text "29" at -73.642,-20.594 h1
  text "2" at -33.383,-21.21 h1
  text "20" at -49,-21.217 h1
  text "10" at -17.586,-24.145 h1
  text "CORESIGHT 20 - SWD + ETM" at -52.075,-26.1 h1
  text "1" at -7.162,-27.29 h1
  text "2" at -4.788,-27.29 h1
  text "20" at -87.813,-30.927 h1
  text "19" at -85.19,-30.927 h1
  text "1" at -65.9,-33.289 h1
  text "VDDCORE" at -64.875,-41.15 h1
  text "J500 Digital High" at -21.966,-42.994 h1 r90
  text "2" at -59.526,-43.46 h1
  text "1" at -59.359,-46 h1
  text "J501 Power" at -69.85,-46.552 h1 r90
  text "1" at -17.586,-47.005 h1
  text "Extension Header 1" at -8.687,-48.657 h1 r90
  text "Erase" at -29.775,-49.885 h1
  text "8" at -66.067,-51.069 h1
  text "8" at -17.586,-51.069 h1
  text "2" at -25.418,-52.255 h1
  text "SAMV71 Debug (SWD)" at -88.765,-52.721 h1 r90
  text "1" at -25.251,-54.795 h1
  text "2" at -79.328,-56.154 h1
  text "1" at -73.642,-56.154 h1
  text "1" at -65.9,-56.149 h1
  text "2" at -87.313,-58.442 h1
  text "1" at -84.607,-58.442 h1
  text "1" at -7.137,-62.85 h1
  text "2" at -4.763,-62.85 h1
  text "LCD Connector" at -88.786,-63.387 h1
  text "J506 SPI" at -46.448,-66.5 h1
  text "J503 Digital Low" at -21.966,-66.962 h1 r90
  text "1" at -84.8,-67.559 h1.5
  text "1" at -17.586,-68.849 h1
  text "5" at -47.736,-68.987 h1
  text "1" at -37.952,-68.981 h1
  text "6" at -47.736,-71.527 h1
  text "2" at -38.119,-71.521 h1
  text "J502 Analog Low" at -70.017,-71.994 h1 r90
  text "10" at -84.8,-72.059 h1.5
  text "MediaLB" at -81.249,-72.296 h1
  text "8" at -66.067,-73.929 h1
  text "8" at -17.586,-73.929 h1
  text "44" at -78.749,-74.377 h1.5
  text "40" at -81.6,-76.703 h1.5
  text "39" at -75.835,-76.699 h1.5
  text "20" at -84.8,-77.059 h1.5
  text "1" at -65.9,-79.009 h1
  text "43" at -76.803,-81.51 h1.5 r90
  text "30" at -84.801,-82.059 h1.5
  text "Extension Header 2" at -8.662,-84.217 h1 r90
  text "40" at -84.8,-87.059 h1.5
  text "42" at -76.803,-87.861 h1.5 r90
  text "J505 Communication" at -21.8,-90.905 h1 r90
  text "1" at -17.586,-91.709 h1
  text "50" at -84.8,-92.059 h1.5
  text "2" at -81.16,-92.546 h1.5
  text "1" at -75.388,-92.538 h1.5
  text "J504 Analog High" at -70.017,-93.508 h1 r90
  text "41" at -78.76,-94.377 h1.5
  text "J507 Digital Extra" at -50.199,-96.168 h1
  text "8" at -66.067,-96.789 h1
  text "35" at -66.858,-99.334 h1
  text "1" at -17.224,-99.334 h1
  text "36" at -66.858,-101.874 h1
  text "2" at -17.439,-101.874 h1
  text "12" at -23.435,-105.975 h1
  text "1" at -9.625,-105.975 h1
  text "10" at -58.184,-107.299 h1
  text "8" at -55.768,-107.299 h1
  text "7" at -54.068,-107.299 h1
  text "6" at -51.638,-107.299 h1
  text "5" at -49.138,-107.299 h1
  text "4" at -46.638,-107.299 h1
  text "3" at -44.138,-107.299 h1
  text "2" at -41.643,-107.299 h1
  text "1" at -38.977,-107.299 h1
  text "9" at -36.638,-107.299 h1
  text "13" at -58.225,-109.2 h1
  text "16" at -33.475,-109.2 h1
  text "11" at -58.225,-116.15 h1
  text "2" at -68.259,-117.588 h1
  text "2" at -80.759,-117.638 h1
  text "SDCARD Socket" at -51.215,-119.197 h1
  text "Ethernet - RJ45" at -23.239,-120.526 h1
  text "(bottom side)" at -50.881,-121.197 h1
  text "14" at -58.225,-122.2 h1
  text "15" at -33.513,-122.2 h1
  text "3" at -70.36,-122.524 h1
  text "1" at -65.825,-122.524 h1
  text "3" at -82.86,-122.574 h1
  text "1" at -78.325,-122.574 h1
  text "12" at -58.225,-126.198 h1
  text "14" at -26.244,-126.258 h1
  text "13" at -7.404,-126.258 h1
  text "CAN" at -61.57,-128.274 h1
  text "5" at -71.143,-129.274 h1
  text "4" at -65.398,-129.274 h1
  text "5" at -83.643,-129.324 h1
  text "4" at -77.898,-129.324 h1
  text "Headphone" at -80.092,-129.682 h1 r90
  text "Microphone" at -67.592,-130.098 h1 r90
  text "2" at -58.155,-130.905 h1
  text "1" at -57.989,-133.445 h1
Mechanical 16:
  lines w0.127: -219,-126.915 -213.92,-126.915 ; -219,-56.255 -213.92,-56.255 ; -219,14.23 -213.92,14.23 ; -169.724,-197.4 -169.724,-192.32 ; -169.724,79.46 -169.724,84.54 ; -125.7,79.46 -125.7,84.54 ; -120.575,-197.4 -120.575,-192.32 ; -76.525,79.46 -76.525,84.54 ; -71.426,-197.4 -71.426,-192.32 ; -22.15,-197.4 -22.15,-192.32 ; -22.15,79.46 -22.15,84.54 ; 26.999,-197.4 26.999,-192.32 ; 26.999,79.46 26.999,84.54 ; 55.32,-184.7 169.62,-184.7 ; 55.32,-177.08 169.62,-177.08 ; 55.32,-169.46 93.42,-169.46 ; 76.148,-197.4 76.148,-192.32 ; 76.148,79.46 76.148,84.54 ; 93.42,-192.32 93.42,-177.08 93.42,-161.84 ; 125.424,-197.4 125.424,-192.32 ; 125.424,79.46 125.424,84.54 ; 146.76,-192.32 146.76,-177.08 ; 169.62,-126.915 174.7,-126.915 ; 169.62,-56.3 174.7,-56.3 ; 169.62,14.185 174.7,14.185 ; 55.32,-192.32 19.76,-192.32 19.76,-161.84 55.32,-161.84 ; 55.32,-192.32 169.62,-192.32 ; 55.32,-192.32 55.32,-161.84 ; 55.32,-161.84 93.42,-161.84 ; 93.42,-161.84 169.62,-161.84 169.62,-192.32 ; 169.62,-192.32 -213.92,-192.32 -213.92,79.46 169.62,79.46 169.62,-192.32 ; -219,-197.4 -219,84.54 174.7,84.54 174.7,-197.4 -219,-197.4
  lines w1: -110.4,-145.7 14.6,-145.7 14.6,19.6 -110.4,19.6 -110.4,-145.7
  text "1" at -194.963,81.111 h0.67
  text "4" at -47.372,81.111 h0.67
  text "5" at 1.904,81.111 h0.67
  text "6" at 50.926,81.111 h0.67
  text "7" at 100.456,81.111 h0.67
  text "8" at 149.478,81.111 h0.67
  text "2" at -148.474,80.975 h0.67
  text "3" at -101.924,80.825 h0.67
  text "A" at -217.095,47.301 h0.67
  text "A" at 171.525,47.256 h0.67
  text "B" at 171.605,-20.799 h0.67
  text "B" at -217.095,-23.311 h0.67
  text "C" at 172.25,-90.25 h0.67
  text "C" at -217.188,-91.488 h0.67
  text "D" at -217.095,-164.202 h0.67
  text "D" at 171.525,-164.202 h0.67
  text "ENGINEER:" at 56.59,-164.38 h0.67
  text "TITLE:" at 94.69,-164.38 h0.67
  text "PCB DESIGNER:" at 56.59,-171.873 h0.67
  text "B" at 20.75,-177 h22
  text "DATE:" at 56.59,-179.62 h0.67
  text "PART NO.:" at 94.69,-179.62 h0.67
  text "REV:" at 148.03,-179.62 h0.67
  text ".PRINT_DATE" at 56.7,-183.5 h0.67
  text "ATMEL NORWAY" at 24,-184.4 h0.67
  text "Vestre Rosten 79" at 23.97,-186.478 h0.67
  text "FILE NAME:" at 56.59,-187.24 h0.67
  text "DWG NO:" at 94.69,-187.24 h0.67
  text "SCALE:" at 148.03,-187.24 h0.67
  text "N-7075 Tiller" at 23.97,-189.78 h0.67
  text ".PCB_FILE_NAME_NO_PATH" at 57.86,-190.288 h0.67
  text "2" at -145.34,-195.688 h0.67
  text "3" at -95.81,-195.688 h0.67
  text "4" at -46.788,-195.688 h0.67
  text "5" at 1.904,-195.688 h0.67
  text "6" at 50.926,-195.688 h0.67
  text "7" at 100.456,-195.688 h0.67
  text "8" at 149.478,-195.688 h0.67

## Dimensions
-20.17,-46.505 to -20.17,-50.569 on Mechanical 5
-42.53,-71.521 to -39.99,-71.521 on Mechanical 5
-19.17,-50.569 to 0,-135 on Mechanical 5
-19.17,-23.645 to 0,-135 on Mechanical 5
-19.17,-73.429 to 0,-135 on Mechanical 5
-90,-135 to -19.67,-91.709 on Mechanical 5
-90,-135 to -62.855,-101.874 on Mechanical 5
-90,-135 to -67.93,-96.789 on Mechanical 5
-63.355,-98.834 to -90,-135 on Mechanical 5
-45.575,-68.481 to -90,-135 on Mechanical 5
-68.43,-32.789 to -90,-135 on Mechanical 5
-68.43,-55.649 to -90,-135 on Mechanical 5
-68.43,-78.509 to -90,-135 on Mechanical 5
-87.65,-2.35 to -90.842,0.842 on Mechanical 6
-88.65,-79.35 to -90,-135 on Mechanical 4
-90,-135 to -88.15,-79.85 on Mechanical 4
-5.233,-14.76 to 0,-135 on Mechanical 4
-5.233,-40.16 to 0,-135 on Mechanical 4
-5.208,-75.72 to 0,-135 on Mechanical 4
-5.7,-76.22 to 0,-135 on Mechanical 4
-90,-135 to 0,-135 on Mechanical 6
-42.659,0 to 0,0 on Mechanical 6
-54.209,0 to 0,0 on Mechanical 6
-21.375,0 to 0,0 on Mechanical 6
-9.825,0 to 0,0 on Mechanical 6
-90,-135 to -87.65,-134 on Mechanical 6
-89,-132.65 to -90,-135 on Mechanical 6
0,0 to 0,-135 on Mechanical 6
-41.85,-5.5 to -41.85,-7.5 on Mechanical 12
-25.75,-1.5 to 0,0 on Mechanical 12
0,0 to -41.6,-1.25 on Mechanical 12
0,0 to -38.6,-1.25 on Mechanical 12
0,0 to -33,-1.25 on Mechanical 12
0,0 to -26,-1.25 on Mechanical 12
0,0 to -48.434,-1.425 on Mechanical 4
-15.1,-2.3 to 0,0 on Mechanical 4
0,0 to -15.6,-1.425 on Mechanical 4

## Text inside footprints (layer, text, board x,y; h text height)
LABEL1: Bottom Overlay "PCBA LABEL" at -2.887,-120.521 h1.52 r270